# Altium PCB LY-3axis-4.0-v2.0-.PcbDoc (part 2 of 2)
Units mil, origin at the board's own origin, x right, y up, seen from the top; angles counter-clockwise.
Board outline 3940.6 x 3390.19 mil, 2 copper layers (TopLayer, BottomLayer); 147 components, 116 nets, 484 pads, 347 vias.
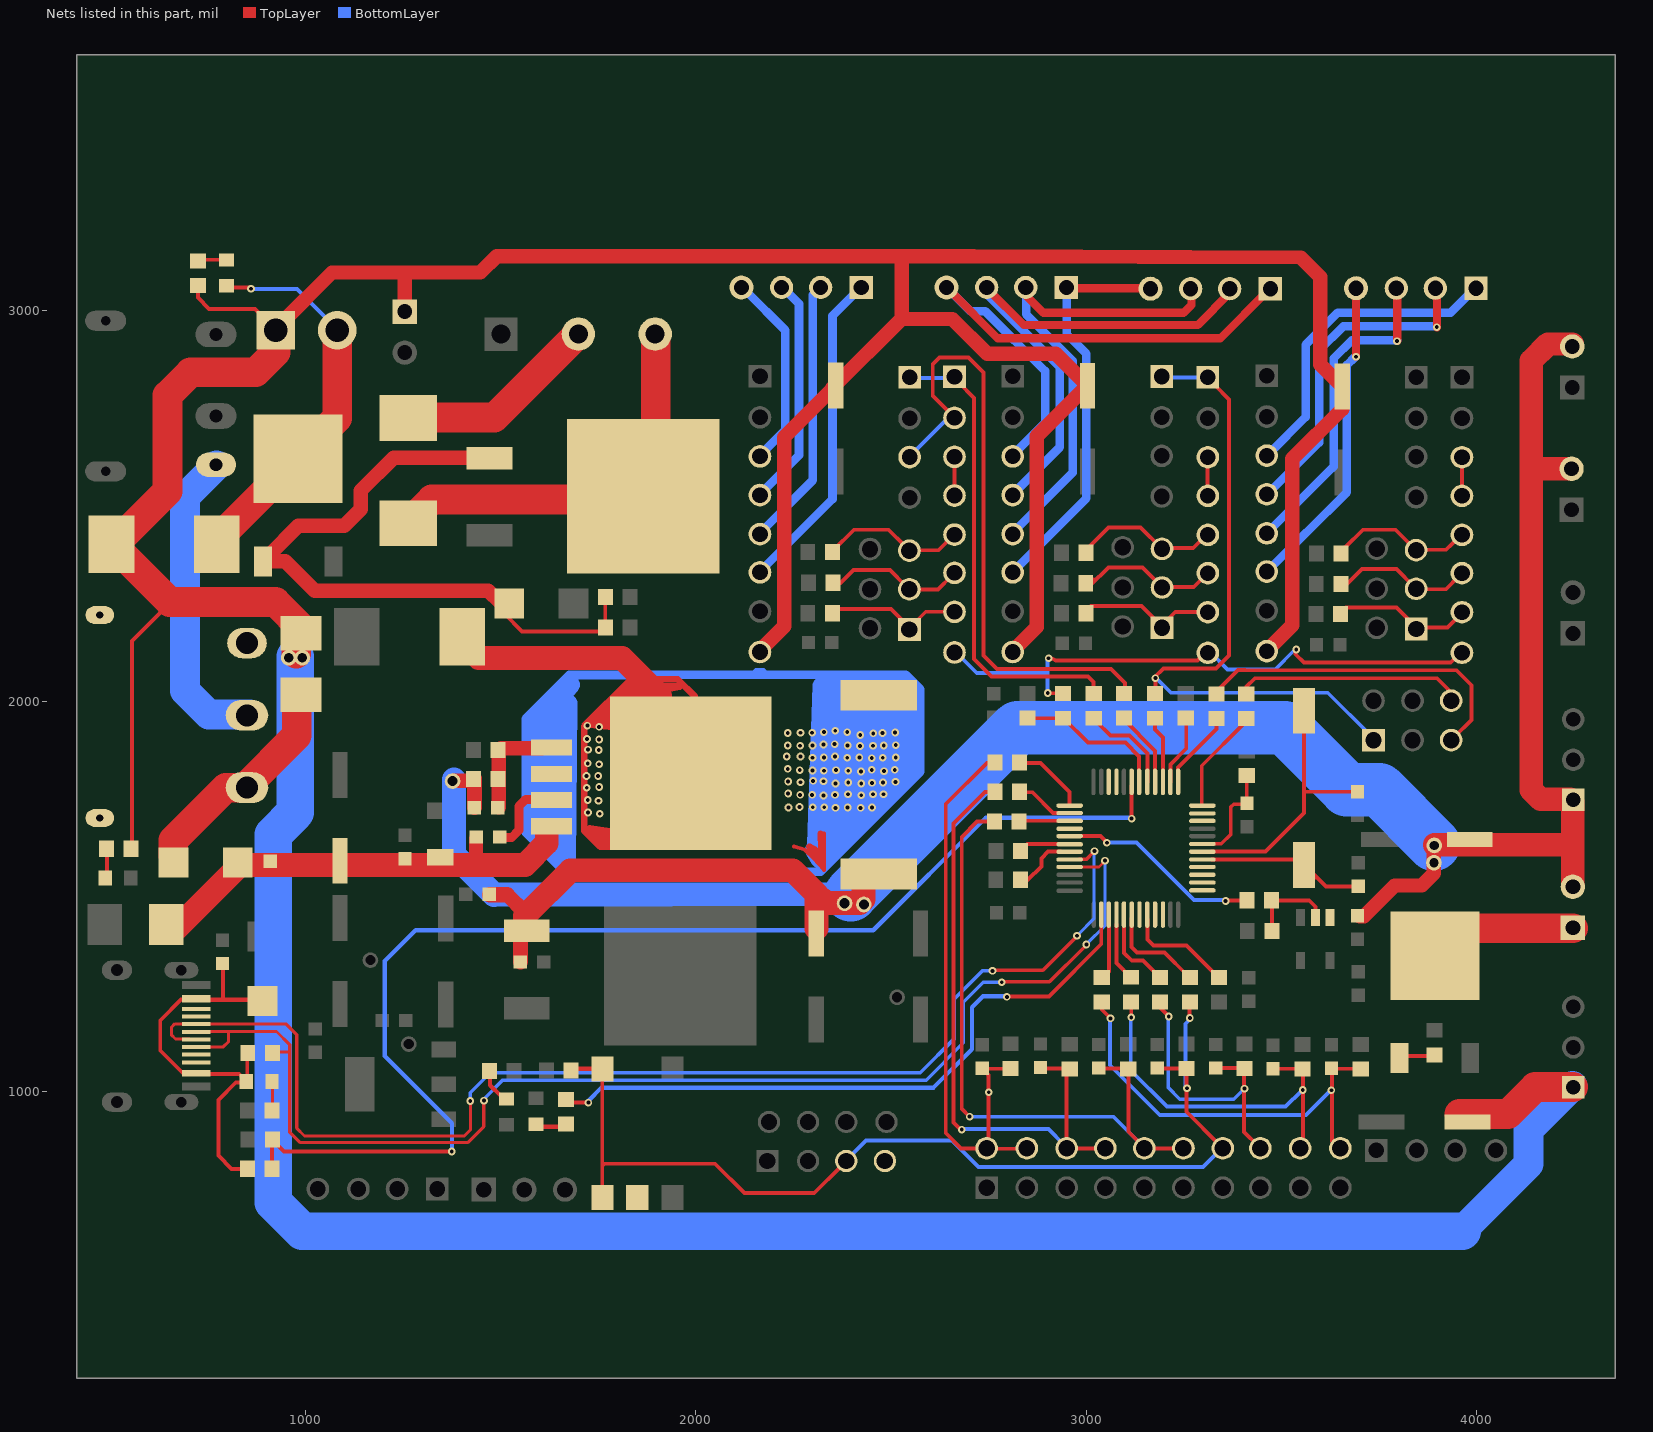
[diagram p2: the nets of this part, all layers, seen from the top]

## Via types
v1: diameter 19.68, hole 9.84, TopLayer to BottomLayer, tented both sides, 347 vias

## Nets (pads, with @x,y where several pads share a name; then routed paths per layer and width w, separated by ;. In a path a pad name is that pad's centre, name@x,y a point inside that pad or via, vN(x,y) a via of type N, cw(c..) or ccw(c..) an arc to the next point about the centre after c; other vN are vias at no path point) (continued)
UnNamedNet12: ?.1@3193.75,2831.82 ?.1@3312.08,2830 ?.1@3736.34,1900.42 ?.2@3176.25,2019.25 | length 1659.9
  TopLayer w9.94: v1@3175.83,2062.08 3197.92,2084.17 3332.92,2084.17 3366.25,2117.5 3366.25,2772.92 3329.58,2809.58 ?.1@3327.08,2809.58 ; ?.2@3178.33,2022.92 v1@3178.33,2057.5
  BottomLayer w9.94: v1@3177.08,2062.08 3217.5,2021.67 3619.17,2021.67 3727.92,1912.92 ?.1@3727.92,1911.25 ; ?.1@3209.58,2829.58 ?.1@3297.5,2829.58
  other v1: 3177.5,2059.17
UnNamedNet13: ?.2@2662.92,2725.83 ?.2@3097.08,2020.08 ?.3@2547.91,2625.5 | length 1567.6
  TopLayer w9.94: ?.2@2651.25,2742.08 2647.92,2742.08 2607.08,2782.92 2607.08,2862.92 2624.58,2880.42 2698.75,2880.42 2737.5,2841.67 2737.5,2116.67 2772.08,2082.08 3064.17,2082.08 3099.58,2046.67 ?.2@3099.58,2027.5
  BottomLayer w9.94: ?.3@2557.5,2631.67 2557.5,2636.67 ?.2@2651.25,2730.42
UnNamedNet14: ?.1@2547.92,2829.74 ?.1@2662.92,2830.83 ?.2@3019.58,2019.25 | length 1166.2
  TopLayer w9.94: ?.1@2674.58,2815.83 2713.33,2777.08 2713.33,2107.92 2757.92,2063.33 3005,2063.33 3019.17,2049.17 ?.2@3019.17,2030
  BottomLayer w9.94: ?.1@2552.92,2827.5 ?.1@2645.83,2827.5
UnNamedNet15: ?.1@553.75,1622.08 ?.1@923.75,2950.42 ?.1@2358.75,2808.75 ?.1@3003.75,2808.33 ?.1@3656.25,2805.83 ?.1@3977.08,922.08 ?.2@503.33,2402.08 ?.2@724.58,3064.92 ?.2@988.75,2174.25 ?.2@1254.58,2997.92 ?.3@4247.93,1011.08 ?.8@2164.58,2126.08 ?.8@2812.08,2126.08 ?.8@3462.92,2128.17 pad.57 pad.58 | length 13929.1
  TopLayer w9.94: ?.1@555.42,1626.25 555.42,2154.17 637.5,2236.25 ; ?.2@724.58,3060 724.58,3033.75 753.33,3005 870.83,3005 890,2985.83 ?.1@890,2980.42
  TopLayer w36.94: ?.1@930.83,2960.83 1068.33,3098.33 1448.33,3098.33 1490,3140 2712.5,3140 3550,3136.67 3600,3086.67 3600,2862.5 3655.83,2806.67 3655.83,2748.33 3528.33,2620.83 3528.33,2195 ?.8@3464.17,2130.83 ; ?.2@1255,3020 1255,3092.5 ; ?.8@2169.17,2134.17 2226.67,2191.67 2226.67,2676.67 2349.17,2799.17 2349.17,2801.67 2527.5,2980 2527.5,3130 ; 2536.67,2980 2537.5,2979.17 2657.5,2979.17 2746.67,2890 2922.5,2890 2995,2817.5 2995,2800 2873.33,2678.33 2873.33,2190 ?.8@2819.17,2135.83
  TopLayer w75.94: ?.1@923.75,2947.92 923.75,2893.75 872.5,2842.5 705.83,2842.5 646.67,2783.33 646.67,2537.92 514.58,2405.83 514.58,2392.5 652.92,2254.17 923.33,2254.17 992.08,2185.42 ?.2@992.08,2180.42 ; pad.58@976.25,2121.25 ?.2@976.25,2173.33
  TopLayer w76.94: 3957.08,942.5 4081.25,942.5 4150.42,1011.67 ?.3@4247.5,1011.67
  BottomLayer w76.94: 3961.67,642.5 4133.33,814.17 4133.33,901.67 ?.3@4245.83,1014.17
  BottomLayer w95.94: pad.57@974.17,2114.17 974.17,1715 917.5,1658.33 917.5,716.67 991.67,642.5 3963.33,642.5
UnNamedNet16: ?.1@2117.08,3060 ?.3@2164.58,2627.08 | length 487.4
  BottomLayer w21.94: ?.1@2125.83,3050.83 2128.75,3050.83 2229.17,2950.42 2229.17,2694.58 ?.3@2167.92,2633.33
UnNamedNet17: ?.2@2220.08,3060 ?.4@2164.58,2528.08 | length 578.9
  BottomLayer w21.94: ?.4@2171.25,2532.5 2171.25,2536.67 2264.58,2630 2264.58,3017.92 ?.2@2225.83,3056.67
UnNamedNet18: ?.3@2320.08,3060 ?.5@2164.58,2428.08 | length 674
  BottomLayer w21.94: ?.5@2173.75,2440 2300,2566.25 2300,3040.83 2312.08,3052.92 ?.3@2315.83,3052.92
UnNamedNet19: ?.4@2424.08,3060 ?.6@2164.58,2330.08 | length 820.5
  BottomLayer w21.94: ?.6@2173.75,2339.17 2173.75,2341.25 2350.42,2517.92 2350.42,2987.5 ?.4@2420.42,3057.5
UnNamedNet20: ?.2@2941.25,2019.25 ?.8@2662.92,2124.83 ?.8@3312.08,2124 ?.8@3962.92,2124 | length 1436
  TopLayer w9.94: v1@2907.92,2112.5 2922.92,2104.17 3285.83,2104.17 ?.8@3302.08,2120.42 ; v1@2908.33,2020.42 ?.2@2921.25,2020.42 ; v1@3536.67,2128.75 3536.67,2120.42 3558.33,2098.75 3934.17,2098.75 ?.8@3954.58,2119.17
  BottomLayer w9.94: ?.8@2678.75,2115.42 2678.75,2113.75 2720,2072.5 2897.92,2072.5 ; v1@2901.67,2025.83 v1@2901.67,2107.08 ; ?.8@3318.75,2127.92 3318.75,2125.42 3362.5,2081.67 3484.58,2081.67 v1@3534.58,2131.67
  other v1: 2901.67,2020.83 2904.17,2110 3538.33,2132.5
UnNamedNet21: ?.3@2662.92,2625.83 ?.4@2662.92,2526.83 | length 83.3
  TopLayer w9.94: ?.4@2662.92,2525.42 ?.3@2662.92,2608.75
UnNamedNet22: ?.2@2350.08,2382.08 ?.5@2547.5,2385.75 ?.5@2662.92,2426.83 | length 337.8
  TopLayer w9.94: ?.2@2351.67,2385.83 2405,2439.17 2494.17,2439.17 2534.58,2398.75 ?.5@2534.58,2389.58 ; ?.5@2570,2386.67 2622.08,2386.67 ?.5@2660.83,2425.42
UnNamedNet23: ?.2@2351.75,2303.33 ?.3@2547.5,2286.75 ?.6@2662.92,2328.83 | length 307
  TopLayer w9.94: ?.2@2359.58,2302.5 2370.83,2302.5 2404.17,2335.83 2497.5,2335.83 ?.3@2537.5,2295.83 ; ?.3@2571.67,2286.25 2620.83,2286.25 ?.6@2655.83,2321.25
UnNamedNet24: ?.1@2547.5,2183.75 ?.2@2350.08,2225.42 ?.7@2662.92,2228.83 | length 316
  TopLayer w9.94: ?.2@2363.75,2236.25 2500.42,2236.25 2545.42,2191.25 2551.25,2191.25 2589.17,2229.17 ?.7@2645.42,2229.17
UnNamedNet25: ?.1@2642.5,3060 ?.3@2812.08,2627.08 ?.4@3472,3056.67 | length 1493.7
  TopLayer w20.94: ?.1@2656.67,3046.67 2773.75,2929.58 3343.75,2929.58 3465,3050.83 ?.4@3466.67,3050.83
  BottomLayer w21.94: ?.1@2651.67,3058.33 2651.67,3051.67 2704.17,2999.17 2741.67,2999.17 2895,2845.83 2895,2713.33 ?.3@2812.08,2630.42
UnNamedNet26: ?.2@2745.5,3060 ?.3@3368,3056.67 ?.4@2812.08,2528.08 | length 1346
  TopLayer w20.94: ?.2@2750.42,3055.83 2750.42,3053.75 2840.42,2963.75 3286.25,2963.75 ?.3@3369.17,3046.67
  BottomLayer w21.94: ?.2@2733.33,3055 2932.5,2855.83 2932.5,2650.42 2816.25,2534.17 ?.4@2814.17,2534.17
UnNamedNet27: ?.2@3268,3056.67 ?.3@2845.5,3060 ?.5@2812.08,2428.08 | length 1219
  TopLayer w20.94: ?.3@2839.58,3046.25 2890.83,2995 3250,2995 3270,3015 ?.2@3270,3046.25
  BottomLayer w21.94: ?.5@2811.25,2430.83 2965.42,2585 2965.42,2872.08 2846.25,2991.25 ?.3@2846.25,3045.42
UnNamedNet28: ?.1@3165,3056.67 ?.4@2949.5,3060 ?.6@2812.08,2330.08 | length 984.6
  TopLayer w20.94: ?.4@2963.33,3057.92 ?.1@3153.33,3057.92
  BottomLayer w21.94: ?.6@2823.75,2343.33 2824.17,2343.33 3000.83,2520 3000.83,2890 2950,2940.83 ?.4@2950,3043.33
UnNamedNet29: ?.3@3312.08,2625 ?.4@3312.08,2526 | length 66.2
  TopLayer w9.94: ?.4@3311.25,2542.5 ?.3@3311.25,2608.75
UnNamedNet30: ?.2@3000.08,2380.42 ?.5@3194.58,2390.33 ?.5@3312.08,2426 | length 351.3
  TopLayer w9.94: ?.2@3008.75,2393.33 3008.75,2396.25 3057.92,2445.42 3139.17,2445.42 3192.5,2392.08 3274.58,2392.08 ?.5@3302.92,2420.42
UnNamedNet31: ?.2@2999.25,2302.08 ?.3@3194.58,2291.33 ?.6@3312.08,2328 | length 346
  TopLayer w9.94: ?.2@3011.67,2297.5 3057.08,2342.92 3144.17,2342.92 3194.17,2292.92 3275.83,2292.92 3297.5,2314.58 ?.6@3302.08,2314.58 ; ?.2@3012.5,2312.5 3019.58,2312.5
UnNamedNet32: ?.1@3194.58,2188.33 ?.2@3000.08,2225.42 ?.7@3312.08,2228 | length 310.4
  TopLayer w9.94: ?.2@3012.08,2243.75 3142.5,2243.75 3184.17,2202.08 3201.67,2202.08 3228.33,2228.75 ?.7@3294.17,2228.75
UnNamedNet33: ?.3@3462.92,2629.17 ?.4@3998.67,3057.92 | length 791.5
  BottomLayer w21.94: ?.3@3468.75,2636.25 3470.83,2636.25 3562.5,2727.92 3562.5,2912.92 3645,2995.42 3934.17,2995.42 ?.4@3982.92,3044.17
UnNamedNet34: ?.3@3894.67,3057.92 ?.4@3462.92,2530.17 | length 845.3
  TopLayer w20.94: v1@3899.17,2957.5 ?.3@3899.17,3055.42
  BottomLayer w21.94: ?.4@3465,2530.42 3597.08,2662.5 3597.08,2898.33 3658.75,2960 v1@3896.25,2960
  other v1: 3898.33,2958.33
UnNamedNet35: ?.2@3794.67,3057.92 ?.5@3462.92,2430.17 | length 820.5
  TopLayer w20.94: v1@3797.08,2923.33 ?.2@3797.08,3047.5
  BottomLayer w21.94: ?.5@3472.5,2431.25 3472.5,2440 3630.42,2597.08 3634.17,2600.83 3634.17,2877.92 3680.42,2924.17 v1@3797.5,2924.17
  other v1: 3796.67,2922.5
UnNamedNet36: ?.1@3691.67,3057.92 ?.6@3462.92,2332.17 | length 807.5
  TopLayer w20.94: v1@3691.25,2883.33 ?.1@3691.25,3051.25
  BottomLayer w21.94: ?.6@3468.33,2337.08 3468.75,2337.08 3665.42,2532.08 3668.33,2535 3668.33,2861.25 3688.33,2881.25 v1@3690.83,2883.75
  other v1: 3691.67,2882.5
UnNamedNet37: ?.3@3962.92,2625 ?.4@3962.92,2526 | length 77.1
  TopLayer w9.94: ?.4@3962.92,2536.25 ?.3@3962.92,2613.33
UnNamedNet38: ?.2@3653.42,2377.91 ?.5@3845.42,2387 ?.5@3962.92,2426 | length 335
  TopLayer w9.94: ?.2@3662.5,2393.33 3663.75,2393.33 3709.58,2439.17 3792.92,2439.17 3844.17,2387.92 3922.5,2387.92 3937.08,2402.5 ?.5@3947.08,2412.5
UnNamedNet39: ?.2@3652.58,2300.41 ?.3@3845.42,2288 ?.6@3962.92,2328 | length 334.1
  TopLayer w9.94: ?.2@3660.83,2292.92 3706.67,2338.75 3795,2338.75 3839.58,2294.17 ?.3@3842.08,2294.17 ; ?.3@3861.67,2286.67 3921.67,2286.67 3955.83,2320.83 ?.6@3962.92,2320.83
UnNamedNet40: ?.1@3845.42,2185 ?.2@3651.75,2223.75 ?.7@3962.92,2228 | length 301.7
  TopLayer w9.94: ?.2@3654.58,2228.33 3665.83,2239.58 3795,2239.58 3837.08,2197.5 ?.1@3837.08,2197.08 ; ?.1@3872.92,2188.75 3925.42,2188.75 ?.7@3956.67,2220
UnNamedNet41: ?.2@3333.75,2018.42 ?.5@3935.33,1900.41 | length 839.4
  TopLayer w9.94: ?.2@3338.33,2029.17 3388.75,2079.58 3407.08,2079.58 3948.75,2079.17 3987.08,2040.83 3987.08,1951.67 3944.58,1909.17 ?.5@3940,1909.17
UnNamedNet42: ?.2@3410.42,2018.42 ?.6@3935.34,2001.41 | length 572.8
  TopLayer w9.94: ?.2@3411.25,2029.17 3411.25,2037.5 3432.5,2058.75 3899.17,2058.75 ?.6@3947.08,2010.83
UnNamedNet43: ?.1@2766.67,1842.92 ?.2@2733.75,1060 ?.2@2745.42,854.75 ?.2@2806.66,1059.5 ?.4@2848.42,854.75 | length 1476.7
  TopLayer w9.94: ?.2@2735.83,1056.67 2750,1042.5 2750,856.25 2751.25,855 2749.58,853.33 ?.4@2842.5,853.33 ; ?.2@2738.33,854.17 2680,854.17 2640.42,893.75 2640.42,1736.25 2745.83,1841.67 ?.1@2754.58,1841.67 ; ?.2@2742.08,1058.33 ?.2@2800.83,1058.33
  other v1: 2750.83,998.33
UnNamedNet44: ?.1@2766.67,1767.92 ?.2@2883.33,1061.67 ?.2@2958.33,1058.25 ?.6@2950.42,854.75 ?.8@3049.42,854.75 | length 1542.7
  TopLayer w9.94: v1@2680.42,902.92 2678.33,902.92 2660.42,920.83 2660,921.25 2660,1686.25 2740.83,1767.08 ?.1@2767.5,1767.08 ; ?.2@2887.08,1057.5 2888.75,1059.17 ?.2@2944.17,1059.17 ; ?.2@2950,1043.75 2950,864.58 2960.42,854.17 3040.83,854.17 ?.8@3041.67,855
  BottomLayer w9.94: v1@2683.33,904.17 2903.33,904.17 ?.6@2942.5,865
  other v1: 2681.67,902.5
UnNamedNet45: ?.1@2765.42,1692.08 ?.2@3032.08,1060.42 ?.2@3107.91,1058.25 ?.10@3149.42,854.75 ?.12@3249.42,854.75 | length 1643.8
  TopLayer w9.94: v1@2700,936.67 2681.67,955 2681.67,1652.5 2720.83,1691.67 ?.1@2755.83,1691.67 ; ?.2@3047.08,1059.17 ?.2@3102.5,1059.17 ; ?.2@3108.33,1047.92 3108.33,897.08 3151.25,854.17 ?.12@3239.17,854.17
  BottomLayer w9.94: v1@2705.42,935.42 3070.42,935.42 3142.08,863.75 ?.10@3150.83,863.75
  other v1: 2701.67,935.83
UnNamedNet46: ?.1@1680.42,1053.75 ?.1@1761.25,728.75 ?.2@3182.08,1060.42 ?.2@3257.08,1059.08 ?.2@3265.83,1229.5 ?.5@1761.25,1057.75 ?.5@2385.75,822.08 ?.14@3350.42,854.75 | length 2543.2
  TopLayer w9.94: ?.1@1760.42,745.42 ?.5@1760.42,1038.75 ; 1764.17,813.33 1765.83,815 2049.58,815 2124.58,740 2303.75,740 ?.5@2370.42,806.67 ; ?.2@3195,1058.75 ?.2@3249.58,1058.75 ; ?.2@3257.08,1051.25 3257.08,948.33 3340.83,864.58 ?.14@3343.75,864.58 ; v1@3264.58,1194.17 ?.2@3264.58,1222.08
  TopLayer w10.94: ?.1@1695.42,1058.33 1740.83,1058.33 ?.5@1760.42,1038.75
  BottomLayer w9.94: ?.5@2392.5,827.08 2392.5,830.83 2435.83,874.17 2656.67,874.17 2724.58,806.25 3299.17,806.25 ?.14@3347.92,855 ; v1@3255,1009.58 3255,1173.75 3262.5,1181.25 v1@3262.5,1185.42
  other v1: 3258.33,1008.33 3265.83,1188.33
UnNamedNet47: ?.2@3189.58,1229.08 ?.2@3332.08,1060.42 ?.2@3405.41,1059.08 ?.16@3446.42,854.75 | length 705.7
  TopLayer w9.94: ?.2@3185.83,1218.75 v1@3208.33,1196.25 ; ?.2@3333.33,1060 ?.2@3397.08,1060 ; ?.2@3405,1058.75 3405,896.25 3441.25,860 ?.16@3443.75,860
  BottomLayer w9.94: v1@3210.42,1191.25 3210.42,1010 3240,980.42 3378.33,980.42 v1@3401.25,1003.33
  other v1: 3405.83,1007.5 3211.67,1192.5
UnNamedNet48: ?.2@3115.41,1229.92 ?.2@3478.75,1058.75 ?.2@3554.58,1057.42 ?.18@3548.42,854.75 | length 914
  TopLayer w9.94: v1@3115.83,1193.75 ?.2@3115.83,1226.67 ; ?.2@3489.17,1058.33 ?.2@3551.25,1058.33 ; ?.18@3555.42,862.92 ?.2@3555.42,1052.5
  BottomLayer w9.94: v1@3114.58,1188.33 3114.58,1054.17 3207.5,961.25 3511.25,961.25 3551.67,1001.67 v1@3554.58,1001.67
  other v1: 3555,1004.17 3115.83,1190
UnNamedNet49: ?.2@3040,1229.5 ?.2@3628.75,1059.58 ?.2@3703.75,1057.42 ?.20@3651.42,854.75 | length 1062.1
  TopLayer w9.94: ?.2@3041.25,1227.08 3041.25,1209.58 3060.42,1190.42 v1@3061.67,1190.42 ; ?.2@3629.58,1052.5 3629.58,873.75 3639.58,863.75 ?.20@3639.58,863.33 ; ?.2@3632.5,1058.33 ?.2@3687.5,1058.33
  BottomLayer w9.94: v1@3060.83,1189.17 3060.83,1067.5 3188.75,939.58 3563.33,939.58 3626.67,1002.92 v1@3627.92,1002.92
  other v1: 3628.33,1003.33 3062.5,1187.5
UnNamedNet50: ?.7@2484.75,822.08
UnNamedNet51: ?.2@3893.72,1348.42 ?.2@4247.08,1419.58 | length 320.4
  TopLayer w74.94: ?.2@3937.5,1393.33 ?.2@3962.5,1418.33
  TopLayer w75.94: ?.2@3962.5,1418.33 ?.2@4247.5,1418.33
UnNamedNet52: ?.1@1471.25,1505.42 ?.1@1550.42,1332.08 ?.1@1567.08,1412.08 ?.1@2308.75,1404.58 ?.1@2468.75,1557.08 ?.1@3982.92,1645.42 ?.1@4243.75,2595.42 ?.1@4245.42,2908.75 ?.1@4247.08,1524.58 ?.2@1430.75,1800.42 ?.2@1432.92,1727.08 ?.2@3695.42,1450.42 ?.3@4247.92,1747.75 pad.49 pad.52 pad.53 pad.55 pad.56 | length 6686.3
  TopLayer w36.94: pad.49@1381.67,1796.25 1427.08,1796.25 ?.2@1432.92,1802.08 ; ?.2@3701.25,1449.17 3712.08,1449.17 3790.83,1527.92 3859.58,1527.92 3890.42,1558.75 pad.52@3890.42,1617.5
  TopLayer w37.94: ?.2@1432.92,1727.5 ?.2@1432.92,1802.08
  TopLayer w38.94: ?.1@1472.5,1504.17 1517.08,1504.17 1561.25,1460 1561.25,1457.08 ; ?.1@1549.58,1397.08 1551.25,1395.42 ?.1@1551.25,1332.5
  TopLayer w59.94: pad.52@3892.5,1632.5 4226.67,1632.5 ; 4160.83,2595 ?.1@4235,2595 ; ?.1@4245,2915 4183.33,2915 4140.83,2872.5 4140.83,1772.5 4165,1748.33 4240,1748.33 4246.67,1741.67 ?.1@4246.67,1529.17
  TopLayer w60.94: ?.1@1562.5,1425.83 1562.5,1450.42 1678.75,1566.67 2248.75,1566.67 2309.17,1506.25 ?.1@2309.17,1417.5 ; 2323.33,1482.92 2420,1482.92 2429.58,1492.5 ?.1@2429.58,1528.33 ; 2323.75,1491.25 2326.25,1491.25
  BottomLayer w61.94: pad.49@1380.83,1799.17 1380.83,1606.67 1483.33,1504.17 2397.5,1505.83
  BottomLayer w136.94: 2397.08,1504.58 2824.58,1932.08 3509.17,1932.08 3667.92,1773.33 3751.25,1773.33 pad.52@3891.25,1633.33
UnNamedNet53: ?.1@773.33,2402.08 ?.2@798.33,3064.42 ?.2@981.25,2621.33 ?.2@1081.75,2950.42 | length 782.9
  TopLayer w9.94: 818.33,3060 v1@860.42,3060
  TopLayer w75.94: ?.1@786.67,2416.67 786.67,2427.5 ?.2@925.83,2566.67 ; ?.2@1028.33,2668.33 1028.33,2671.67 1081.67,2725 ?.2@1081.67,2937.5
  BottomLayer w9.94: v1@866.67,3056.25 978.33,3056.25 ?.2@1070.42,2964.17
  other v1: 860.83,3056.67
UnNamedNet54: ?.1@1263.75,2455.42 ?.2@1865.08,2525.08 ?.3@1896.25,2940.42 | length 770.6
  TopLayer w75.94: ?.1@1276.67,2469.17 1324.17,2516.67 1740.83,2516.67 ?.2@1747.5,2510 ; ?.3@1897.5,2935.83 1897.5,2660.83 ?.2@1899.17,2659.17
UnNamedNet55: ?.2@1263.75,2725.42 ?.2@1699.25,2940.42 | length 475.3
  TopLayer w75.94: ?.2@1300.83,2731.67 1305.83,2726.67 1484.17,2726.67 ?.2@1689.17,2931.67
UnNamedNet56: ?.1@850.42,2148.75
UnNamedNet57: ?.2@850.42,1963.75 ?.3@771.25,2605.58 | length 802
  BottomLayer w75.94: ?.3@772.5,2604.17 691.67,2523.33 691.67,2026.67 752.5,1965.83 ?.2@857.5,1965.83
UnNamedNet58: ?.1@662.08,1587.08 ?.1@988.75,2016.25 ?.3@850.42,1778.75 | length 557.6
  TopLayer w75.94: ?.1@661.25,1603.75 661.25,1643.33 795.83,1777.92 843.75,1777.92 977.92,1912.08 ?.1@977.92,1999.17
  TopLayer w76.94: ?.1@977.92,1999.17 ?.1@980,2001.25
UnNamedNet59: ?.4@473.42,2220.75
UnNamedNet60: ?.5@473.42,1700.75
UnNamedNet61: ?.1@848.75,1025.42 ?.1@890.42,1232.08 ?.2@720.42,1237.92 ?.2@787.92,1327.92 ?.2@851.58,802.08 ?.2@852.42,1098.75 ?.11@720.42,1046.92 | length 977.4
  TopLayer w9.94: ?.11@688.75,1049.17 684.58,1049.17 628.33,1105.42 628.33,1182.5 681.25,1235.42 ?.2@749.17,1235.42 ; ?.11@739.17,1044.58 830.42,1044.58 832.08,1042.92 ?.1@837.5,1037.5 ; 789.17,1238.33 ?.2@789.17,1327.5 ; ?.2@839.58,801.67 811.25,801.67 777.08,835.83 777.08,978.75 821.67,1023.33 845.42,1023.33 851.25,1029.17 ?.2@851.25,1082.92
  TopLayer w10.94: ?.2@749.17,1235.42 ?.1@864.17,1235.42
UnNamedNet62: ?.3@720.42,1211.92
UnNamedNet63: ?.4@720.42,1191.92
UnNamedNet64: ?.5@720.42,1172.92 ?.7@720.42,1133.92 ?.32 | length 3246.2
  TopLayer w7.94: ?.7@702.92,1134.58 667.5,1134.58 656.67,1145.42 656.67,1164.17 665.83,1173.33 950,1173.33 977.92,1145.42 977.92,906.25 997.92,886.25 1407.08,886.25 1422.92,902.08 v1@1422.92,972.92
  TopLayer w8.94: v1@2766.67,1310 2767.5,1310.83 2889.58,1310.83 v1@2975.42,1396.67 ; ?.32@2982.08,1594.58 3000.42,1594.58 v1@3020,1614.17
  BottomLayer w7.94: v1@2979.17,1401.25 2979.17,1401.67 3020,1442.5 v1@3020,1618.75
  BottomLayer w8.94: v1(1422.5,975.83) 1422.5,996.67 1473.75,1047.92 2575,1047.92 2662.92,1135.83 2662.92,1237.5 2735.42,1310 v1@2757.5,1310
  other v1: 2760.42,1309.17 2976.67,1399.17 3021.67,1615.83
UnNamedNet65: ?.1@915.42,1098.75 ?.6@720.42,1152.92 ?.8@720.42,1113.92 ?.33 | length 3214
  TopLayer w7.94: ?.8@748.33,1113.75 788.75,1113.75 803.33,1128.33 803.33,1150 ; ?.6@748.33,1153.75 926.25,1153.75 960,1120 960,895.83 985.83,870 1417.08,870 1457.08,910 v1@1457.08,971.67 ; ?.1@922.92,1100.83 957.08,1100.83 ; ?.33@2977.92,1575.42 3033.33,1575.42 v1@3047.5,1589.58
  TopLayer w8.94: v1@2788.75,1280.83 2906.25,1280.83 v1@2996.67,1371.25
  BottomLayer w7.94: v1@3000.83,1376.25 3000.83,1377.08 3048.33,1424.58 v1@3048.33,1592.92
  BottomLayer w8.94: v1@1459.17,981.25 1459.17,983.33 1505,1029.17 2590.42,1029.17 2685.83,1124.58 2685.83,1229.17 2736.67,1280 v1@2777.08,1280
  other v1: 1457.5,976.67 2784.17,1280 3000.83,1376.67 3048.33,1591.67
UnNamedNet66: ?.9@720.42,1094.92
UnNamedNet67: ?.10@720.42,1074.92
UnNamedNet68: ?.2@1401.67,2164.58 ?.2@2468.75,2015.08 ?.3@1630.42,1813.75 ?.6@1987.42,1815.75 | length 10251.5
  TopLayer w9.94: 2252.08,1627.92 2280.42,1619.17 2302.5,1597.08 2328.33,1567.92 2328.33,1660.83 ; 2319.58,1660.83 2326.67,1660.83
  TopLayer w14.94: 2319.58,1660.83 2322.08,1585.42
  TopLayer w16.94: v1@1726.67,1939.58 1790,1932.92 1782.5,1950 1738.33,1945.83 1782.08,1986.25 1779.17,1960.42 1762.5,1952.92 1808.33,2014.17 1840.83,2037.5 1832.92,2038.75 1951.25,2038.75 1958.75,2037.08 1860,2018.33 1822.08,2010 1847.08,2029.58 1852.5,2022.5 ; 1728.33,1674.58 1781.25,1666.25 1770,1655.42 1779.58,1653.33 1730.42,1671.67 1762.08,1640 ?.6@1792.08,1640 ; ?.6@1787.92,1627.92 1755,1627.92 1714.17,1668.75 1714.17,1936.25 1833.75,2055.83 1954.17,2055.83 1997.92,2012.08 ?.6@1997.92,2002.08 ; 2310,1611.67 2306.25,1618.75 2290.83,1627.5 2322.08,1585.42
  TopLayer w60.94: ?.2@1427.5,2127.5 1444.17,2110.83 1810.83,2110.83 1908.33,2013.33
  BottomLayer w9.94: 2145.83,2070.83 2154.58,2079.58 2173.33,2079.58 2181.67,2071.25
  BottomLayer w21.94: 1657.92,1569.58 1564.17,1663.33 1564.17,1955 1676.25,2067.08 1835.83,2067.08 2537.92,2067.92 2575.42,2030.42 2575.42,1819.17 2320.83,1563.33 1665.83,1563.33 1660.42,1568.75 ; 1659.58,1563.75 1661.25,1569.58
  BottomLayer w44.94: 1632.5,1936.67 1611.67,1690 1639.17,1659.17 1640,1970 1675,1994.17 1670.83,1588.33 1589.17,1677.5 1592.5,1943.33 1681.67,2041.67 ; 2302.5,1619.17 2317.5,1594.17 2555.83,1837.5 2548.33,2017.5 2534.17,2035 2321.67,2040 2307.5,1632.5 v1@2519.17,1858.33
  BottomLayer w51.94: 2504.17,2004.17 v1@2506.67,1860
  BottomLayer w53.94: 2355.83,2016.67 2396.67,1962.5 2342.5,1890.83 2363.33,1998.33 2434.17,1997.5 2419.17,1886.67 2320.83,1811.67 2458.33,1995 2473.33,1995 2332.5,1772.5 2470.83,1851.67 2332.5,1707.5 2452.5,1858.33 2504.17,2004.17
  other v1: 1754.17,1711.67 1724.17,1715 2358.33,1726.67 2422.5,1726.67 2237.5,1727.5 2300,1728.33 2329.17,1728.33 2389.17,1727.5 2451.67,1727.5 2265.83,1729.17 1750.83,1745 1723.33,1746.67 2327.5,1758.33 2424.17,1759.17 2267.5,1760 2298.33,1760 2356.67,1760 2390,1761.67 2454.17,1761.67 2480.83,1761.67 2236.67,1763.33 1720.83,1778.33 1752.5,1780 2358.33,1789.17 2424.17,1789.17 2451.67,1790.83 2268.33,1792.5 2390.83,1791.67 2480,1791.67 2511.67,1793.33 2236.67,1794.17 2327.5,1795 2300.83,1795.83 1720,1808.33 1750,1808.33 2423.33,1820 2482.5,1820.83 2299.17,1822.5 2328.33,1821.67 2390.83,1821.67 2266.67,1823.33 2359.17,1823.33 2450.83,1824.17 2510,1824.17 2235.83,1826.67 1752.5,1838.33 1723.33,1840.83 2450.83,1854.17 2299.17,1855 2388.33,1855 2479.17,1855 2328.33,1855.83 2419.17,1855.83 2512.5,1855.83 2233.33,1858.33 2268.33,1858.33 2356.67,1858.33 1751.67,1875 1724.17,1875.83 2420.83,1885 2267.5,1885.83 2454.17,1885.83 2235.83,1886.67 2299.17,1886.67 2389.17,1886.67 2481.67,1886.67 2512.5,1887.5 2327.5,1889.17 2355.83,1890 1752.5,1901.67 1721.67,1903.33 2421.67,1913.33 2235.83,1918.33 2455,1917.5 2478.33,1918.33 2268.33,1919.17 2298.33,1919.17 2510.83,1920 2328.33,1920.83 2388.33,1920.83 2357.5,1924.17 1752.5,1934.17 1722.5,1937.5
UnNamedNet69: ?.1@1088.33,1591.25 ?.1@1345.42,1600.42 ?.2@643.83,1428.33 ?.2@827.08,1587.08 ?.2@910.42,1590.42 ?.2@1255.42,1596.25 ?.2@1437.92,1652.08 ?.5@1630.42,1679.75 | length 1134.9
  TopLayer w36.94: ?.2@1437.08,1647.5 1437.08,1590.83 1440.42,1587.5
  TopLayer w60.94: ?.2@661.67,1420.42 672.5,1420.42 832.5,1580.42 1562.5,1580.42 1618.33,1636.25 ?.5@1618.33,1663.75
UnNamedNet70: ?.1@1497.92,1652.08 ?.4@1630.42,1746.75 | length 164.4
  TopLayer w22.94: ?.1@1511.25,1650.83 1528.33,1650.83 1547.08,1669.58 1547.08,1730.42 1565,1748.33 ?.4@1599.58,1748.33
UnNamedNet71: ?.1@1492.92,1727.08 ?.1@1493.75,1800.42 ?.1@1493.75,1875.42 ?.2@1630.42,1881.75 | length 258.2
  TopLayer w36.94: ?.1@1495,1727.92 1495,1873.33 1501.67,1880 ?.2@1605,1880
UnNamedNet72: ?.1@891.25,2358.33 ?.1@1472.08,2622.08 ?.2@1522.08,2250.42 ?.2@1769.08,2188.75 ?.2@1769.08,2267.08 | length 1660.9
  TopLayer w9.94: ?.2@1510.83,2223.33 1555.42,2178.75 1761.25,2178.75 1768.33,2185.83 ?.2@1768.33,2252.08
  TopLayer w36.94: ?.1@1430.83,2623.75 1226.25,2623.75 1142.08,2539.58 1142.08,2491.67 1099.58,2449.17 981.67,2449.17 905.42,2372.92 905.42,2358.75 948.75,2358.75 1024.17,2283.33 1468.75,2283.33 1500,2252.08 ?.2@1505.42,2252.08
UnNamedNet73: ?.1@3802.92,1085.42 ?.2@3892.91,1094.08 | length 62.1
  TopLayer w9.94: ?.1@3819.58,1091.25 ?.2@3881.67,1091.25
UnNamedNet74: ?.2@1850.25,728.75
UnNamedNet75: ?.1@3558.75,1580.42 ?.1@3697.08,1526.25 ?.5@3297.92,1594.42 | length 381.4
  TopLayer w9.94: ?.5@3322.92,1594.17 ?.1@3554.58,1594.17 ; ?.1@3567.5,1567.92 3572.5,1567.92 3615,1525.42 ?.1@3688.75,1525.42 ; ?.1@3578.75,1547.92 3589.58,1547.92
UnNamedNet76: ?.2@3557.75,1975.42 ?.2@3695.42,1767.92 ?.6@3297.92,1614.42 | length 636.6
  TopLayer w9.94: ?.6@3321.25,1615 3460,1615 3558.33,1713.33 ?.2@3558.33,1940 ; 3562.92,1767.92 ?.2@3695,1767.92
UnNamedNet77: ?.1@3624.58,1446.25
UnNamedNet78: ?.1@3475.42,1490 ?.1@3475.83,1411.25 ?.2@3587.58,1446.25 | length 203.9
  TopLayer w9.94: ?.1@3476.67,1415.83 3476.67,1478.33 3487.92,1489.58 3571.67,1489.58 3587.92,1473.33 ?.2@3587.92,1454.58
UnNamedNet79: ?.1@914.58,951.25 ?.2@914.75,1025.42 | length 53.3
  TopLayer w7.94: ?.1@915.83,958.75 ?.2@915.83,1012.08
UnNamedNet80: ?.1@914.58,802.08 ?.1@915.42,877.08 ?.19@3116.92,1793.42 | length 3235.7
  TopLayer w9.94: ?.1@914.58,807.08 ?.1@914.58,869.58 ; ?.1@915.42,875.83 945,846.25 1372.5,846.25 v1@1374.17,847.92 ; ?.19@3116.67,1782.92 3116.67,1705.83 v1@3117.92,1704.58
  BottomLayer w10.94: v1@1375.42,846.67 1375.42,918.75 1203.33,1090.83 1203.33,1334.17 1282.5,1413.33 2455,1413.33 2743.33,1701.67 v1@3115,1701.67
  other v1: 1375,846.67 3116.67,1699.17
UnNamedNet81: ?.1@1515,980.83 ?.2@1471.58,1052.92 | length 75
  TopLayer w10.94: ?.2@1472.92,1046.25 1472.92,1016.25 1502.08,987.08 ?.1@1505.83,987.08
UnNamedNet82: ?.1@1667.92,979.58 ?.38 | length 1643.3
  TopLayer w9.94: ?.1@1674.58,971.67 v1@1717.92,971.67 ; v1@2800,1243.75 2904.58,1243.75 3038.75,1377.92 ?.38@3038.75,1442.08
  BottomLayer w10.94: v1@1725.83,977.08 1758.75,1010 2609.17,1010 2707.5,1108.33 2707.5,1215.83 2735.83,1244.17 v1@2793.75,1244.17
  other v1: 1725,971.67 2797.08,1242.5
UnNamedNet83: ?.2@1590.42,916.5 ?.2@1667.92,916.58 | length 72.3
  TopLayer w10.94: ?.2@1591.67,910 1663.33,910 ?.2@1663.75,910.42
UnNamedNet84: ?.1@487.08,1547.08 ?.2@490.75,1622.08 | length 51.2
  TopLayer w9.94: ?.1@491.67,1557.5 ?.2@491.67,1608.75
UnNamedNet85: ?.1@724.58,3127.92 ?.1@798.33,3130.42 | length 63
  TopLayer w9.94: ?.1@727.92,3129.58 729.17,3130.83 ?.1@790.42,3130.83
UnNamedNet86: ?.2@2831.75,1542.5 ?.31 | length 134.2
  TopLayer w9.94: ?.2@2842.5,1541.67 2850.42,1541.67 2885.42,1576.67 2885.42,1597.08 2902.92,1614.58 ?.31@2934.58,1614.58
UnNamedNet87: ?.2@2832.17,1616.67 ?.30 | length 111.7
  TopLayer w9.94: ?.2@2833.75,1617.92 2850,1634.17 ?.30@2938.75,1634.17
UnNamedNet88: ?.2@2828.42,1692.08 ?.27 | length 101.7
  TopLayer w9.94: ?.2@2833.33,1693.75 ?.27@2935,1693.75
UnNamedNet89: ?.2@2829.67,1767.92 ?.26 | length 126.1
  TopLayer w9.94: ?.2@2844.17,1766.67 2862.5,1766.67 2915.42,1713.75 ?.26@2948.33,1713.75
UnNamedNet90: ?.2@2829.67,1842.92 ?.25 | length 185.3
  TopLayer w9.94: ?.2@2834.17,1841.25 2882.92,1841.25 2957.08,1767.08 ?.25@2957.08,1735.42
UnNamedNet91: ?.1@2850,1956.67 ?.1@2941.25,1956.25 ?.18@3135.92,1793.42 | length 388
  TopLayer w9.94: ?.1@2859.17,1957.5 2860.42,1956.25 2942.5,1956.25 3005,1893.75 3100.83,1893.75 3135.83,1858.75 ?.18@3135.83,1788.33
UnNamedNet92: ?.1@3019.58,1956.25 ?.17@3156.92,1793.42 | length 238.2
  TopLayer w9.94: ?.1@3025.83,1948.75 3062.5,1912.08 3111.25,1912.08 3156.92,1866.42 ?.17@3156.92,1793.42
UnNamedNet93: ?.1@3097.08,1957.08 ?.16@3176.92,1793.42 | length 196.3
  TopLayer w9.94: ?.1@3094.17,1955.42 3176.92,1872.67 ?.16@3176.92,1793.42
UnNamedNet94: ?.1@3176.25,1956.25 ?.15@3196.92,1793.42 | length 165
  TopLayer w9.94: ?.1@3176.67,1950 3176.67,1927.08 3196.92,1906.83 ?.15@3196.92,1793.42
UnNamedNet95: ?.1@3255.42,1957.08 ?.14@3215.92,1793.42 | length 175.1
  TopLayer w9.94: ?.14@3215.92,1793.42 3215.92,1837.58 3256.67,1878.33 ?.1@3256.67,1951.67
UnNamedNet96: ?.1@3333.75,1955.42 ?.13@3235.92,1793.42 | length 200
  TopLayer w9.94: ?.13@3235.92,1793.42 3235.92,1830.5 3333.75,1928.33 ?.1@3333.75,1952.92
UnNamedNet97: ?.1@3410.42,1955.42 ?.12@3297.92,1732.42 | length 259.7
  TopLayer w9.94: ?.12@3296.25,1733.75 3296.25,1834.58 3404.17,1942.5 ?.1@3404.17,1948.75
UnNamedNet98: ?.1@3411.67,1809.17 ?.2@3412.08,1738.75 ?.7@3297.92,1634.42 | length 231
  TopLayer w8.94: ?.7@3320.42,1634.58 3346.25,1634.58 3371.25,1659.58 3371.25,1729.58 3377.92,1736.25 ?.2@3410.42,1736.25 ; ?.2@3411.67,1743.33 ?.1@3411.67,1801.25
UnNamedNet99: ?.2@3412.42,1490 ?.29 | length 489.6
  TopLayer w9.94: ?.29@2970,1655 3036.67,1655 3051.25,1640.42 v1@3051.67,1640.42 ; v1@3362.08,1489.58 ?.2@3407.08,1489.58
  BottomLayer w9.94: v1@3056.25,1637.92 3129.17,1637.92 3276.67,1490.42 v1@3352.08,1490.42
  other v1: 3357.5,1488.33 3053.33,1637.5
UnNamedNet100: ?.1@3340.42,1292.5 ?.44 | length 262.1
  TopLayer w9.94: ?.44@3157.5,1440.42 3157.5,1389.58 3172.5,1374.58 3257.5,1374.58 3329.17,1302.92 ?.1@3332.92,1302.92
UnNamedNet101: ?.1@3265.83,1292.5 ?.42 | length 245.7
  TopLayer w9.94: ?.42@3116.67,1442.92 3116.67,1370 3130.83,1355.83 3201.25,1355.83 3259.17,1297.92 ?.1@3259.58,1297.92
UnNamedNet102: ?.1@3189.58,1292.08 ?.41 | length 185.8
  TopLayer w9.94: ?.41@3097.08,1431.67 3097.08,1355.42 3117.08,1335.42 3146.25,1335.42 3180.42,1301.25 ?.1@3180.42,1297.5
UnNamedNet103: ?.1@3115.42,1292.92 ?.40 | length 154.3
  TopLayer w9.94: ?.40@3077.5,1427.5 3077.5,1329.17 ?.1@3117.08,1289.58
UnNamedNet104: ?.1@3040,1292.5 ?.39 | length 137.6
  TopLayer w9.94: ?.1@3054.17,1302.92 3058.33,1307.08 ?.39@3058.33,1438.75
UnNamedNet105: ?.1@3297.92,1515.42
UnNamedNet106: ?.2@3297.92,1535.42
UnNamedNet107: ?.3@3297.92,1555.42
UnNamedNet108: ?.4@3297.92,1575.42
UnNamedNet109: ?.10@3297.92,1693.42
UnNamedNet110: ?.11@3297.92,1712.42
UnNamedNet111: ?.21
UnNamedNet112: ?.22
UnNamedNet113: ?.28
UnNamedNet114: ?.43
UnNamedNet115: ?.45
UnNamedNet116: ?.46
copper on no net: | length 71.7
  TopLayer w6.87: 963.33,1199.58 983.33,1180.42 983.33,1198.33 980,1196.25 979.58,1188.75 971.67,1199.58 972.92,1199.58

## Polygon pours and split planes (outlines as drawn)
UnNamedNet3 on TopLayer "TopLayer-UnNamedNet3 1" (hatched 90Degree grid 7.87 track 7.87, remove dead copper, pour order 2): 447.5,2495.83 528.33,2495.83 585,2552.5 585,2662.5 477.92,2662.5 460,2680.42 445.42,2680.42 445.42,2501.67
UnNamedNet3 on TopLayer "TopLayer-UnNamedNet3" (hatched 90Degree grid 7.87 track 7.87, remove dead copper, pour order 0): 970.83,705.83 970.83,681.67 612.5,681.67 630,699.17 647.08,725 658.75,754.17 661.67,775 662.08,801.67 656.67,831.25 644.17,860.83 621.67,890.83 597.92,911.67 571.67,924.17 545.42,932.5 511.67,935.83 479.17,930 447.08,917.92 446.67,917.92 445,917.92 445,1656.25 579.17,1655.83 579.17,2146.67 645,2212.5 645,2336.67 594.17,2387.5 594.17,2445 692.5,2543.33 692.5,2795.42 577.92,2795.42 480.42,2892.92 445,2892.92 445,2998.75 483.33,2990 542.92,2985 563.33,2989.58 587.08,3000.83 607.5,3013.33 627.08,3032.92 645.42,3058.33 656.25,3086.67 661.25,3113.75 660.42,3149.17 652.5,3179.58 640.83,3201.25 622.5,3225.42 600,3246.25 592.92,3248.75 4166.67,3247.08 4171.67,3247.92 4147.08,3228.33 4126.25,3202.08 4110,3166.67 4106.67,3148.33 4104.58,3122.5 4107.5,3098.75 4114.58,3072.92 4125.83,3050.83 4141.25,3029.58 4161.67,3011.25 4183.33,2995.42 4207.92,2985.42 4235,2980.42 4256.25,2977.5 4270.42,2980.83 4305,2990.42 4322.5,2997.08 4322.5,2273.33 4300.42,2273.33 4300.83,1798.33 4202.5,1798.33 4202.5,1260 4324.58,1260 4324.58,915 4299.17,930 4272.5,935 4238.33,934.17 4223.75,933.33 4203.75,927.5 4183.75,919.58 4160.42,902.92 4139.58,882.5 4125.42,861.25 4114.17,836.67 4106.67,804.17 4106.67,779.58 4112.08,750 4125.42,721.25 4145,692.08 4158.33,681.25 3746.25,681.25 2544.17,683.75 2501.25,683.75 1897.5,683.33 1897.5,823.33 1748.33,823.33 1748.33,749.17 1719.17,749.17 1719.17,674.17 1063.33,674.17 1033.33,715 973.33,706.67
UnNamedNet3 on BottomLayer "BottomLayer-UnNamedNet3" (hatched 90Degree grid 7.87 track 7.87, remove dead copper, pour order 4): 461.67,2195.42 445,2195.42 445,915.83 470.83,928.75 494.58,935 517.08,937.08 537.5,935.42 572.08,925.42 601.67,907.92 617.5,895.42 637.5,871.25 650,844.17 657.5,825.42 660,795 656.67,759.58 647.92,732.92 634.58,706.25 610.42,681.25 857.92,681.25 858.33,708.33 1540,708.33 1540,815 1540,835 2205,835 2258.33,781.67 2650,781.67 2650,728.33 3815,728.33 4026.67,940 4145,940 4182.5,977.5 4261.67,977.5 4261.67,935.42 4277.92,935 4305,927.08 4321.25,918.75 4321.25,3004.58 4288.75,2990.83 4260,2985 4227.08,2986.67 4194.58,2996.25 4158.33,3018.33 4128.75,3050.42 4113.75,3080 4106.67,3114.58 4106.25,3148.75 4113.75,3178.33 4133.75,3216.67 4155.83,3241.25 4171.67,3250.83 1875.83,3251.25 1267.08,3248.75 595.83,3248.75 612.92,3235.83 632.08,3216.25 645,3192.08 653.33,3174.58 659.58,3150.42 660.42,3137.08 661.25,3115.42 658.33,3095.42 645,3059.17 627.92,3032.92 605.83,3012.92 583.33,2998.33 558.75,2987.92 532.5,2983.75 461.25,2995 445.83,3000.83 444.17,2990 448.33,2945.42 492.92,2921.67 629.58,2807.5 651.25,2743.33 647.5,2633.33 677.5,2595.83 747.5,2515 747.5,2482.5 445,2482.5 445,2243.75 460.83,2243.75 460.83,2194.17

## Keep-outs
KeepOutLayer:
  circle w3.94: c663.44,1255.94 r15
  circle w3.94: c663.44,1029.9 r15
  circle w3.94: c517.5,790 r62.4
  circle w3.94: c4253.96,787.92 r62.4
  circle w3.94: c4251.04,3125.21 r62.4
  circle w3.94: c516.04,3127.29 r62.4
  circle w3.94: c612.92,3454.58 r99.42
  circle w3.94: c4152.29,3451.25 r99.42
  circle w3.94: c4115.83,460.83 r99.42
  circle w3.94: c618.33,462.08 r99.42
  lines w3.94: 416.67,481.67 ccw(c630.83,481.67) 630.83,267.5 4132.92,267.5 ccw(c4132.92,487.92) 4353.33,487.92 4353.33,3419.58 ccw(c4119.17,3419.58) 4119.17,3653.75 632.08,3653.75 ccw(c632.08,3438.33) 416.67,3438.33 416.67,481.67
  text "T=1.6MM" at 520.84,-1.67 h236.22

## Other copper
TopLayer:
  rectangle net UnNamedNet68: 1577.5,1789.17 1757.5,1838.75
  rectangle net UnNamedNet3: 1198.75,921.25 1382.08,977.08
  rectangle net UnNamedNet3: 1004.17,919.17 1077.92,1118.33
  rectangle net UnNamedNet68: 1913.75,1649.17 2556.25,2036.67
  rectangle net UnNamedNet68: 2146.67,1620 2332.92,1682.08
  rectangle net UnNamedNet68: 1713.75,1670.83 1790,1941.67
  rectangle net UnNamedNet3: 3307.08,1211.25 3380.83,1252.92
  rectangle net UnNamedNet3: 3516.25,1379.58 3554.58,1463.12
  rectangle net UnNamedNet3: 3544.79,1379.79 3676.04,1404.17
  rectangle net UnNamedNet3: 3656.88,1285.62 3759.38,1411.04
  rectangle net UnNamedNet3: 441.67,2792.92 581.67,2938.33
  rectangle net UnNamedNet3: 441.25,2630 463.33,2830.83
  rectangle: 952.92,1197.08 1046.66,1291.67
  rectangle net UnNamedNet3: 3449.58,1097.5 3512.92,1156.25
  rectangle net UnNamedNet3: 2758.75,1347.92 2788.33,1489.17
  rectangle net UnNamedNet3: 3485.42,1336.67 3516.67,1367.92
BottomLayer:
  rectangle net UnNamedNet68: 1670,1566.67 2321.67,2064.17
  rectangle net UnNamedNet3: 441.25,2617.08 464.17,2822.5
  rectangle net UnNamedNet3: 441.25,2465.42 631.25,2665.83
  rectangle net UnNamedNet3: 591.67,2622.08 688.75,2808.33
  rectangle net UnNamedNet3: 441.25,2795 692.5,2962.08

## Silkscreen, mask and mechanical layers (free items; w line width, h text height)
TopOverlay:
  lines w7.94: 1405.42,3101.25 1405.42,3170.42 1994.25,3170.42 1994.25,3099.42 ; 1597.08,3099.58 1597.08,3170.42 ; 1798.75,3099.58 1798.75,3170.42 ; 3669.33,1852.42 3669.33,1855.42 ; 3669.58,1852.08 3669.58,1847.08 3669.58,1799.58 4011.33,1799.58 4011.33,1852.41 ; 4035.42,952.92 4035.42,1313.75 4106.25,1313.75 ; 4039.58,918.08 4104.93,918.08 ; 4104.92,1654.75 4035.42,1654.75 4035.42,2050.42 4108.75,2050.42 ; 4105.42,2692.08 4033.75,2692.08 4033.75,2394.42 4105.75,2394.42 ; 4107.08,3005.42 4035.42,3005.42 4035.42,2707.75 4107.42,2707.75 ; 4108.75,1621.25 4031.25,1621.25 4031.25,1323.58 4109.08,1323.58 ; 4108.75,2375.42 4033.75,2375.42 4033.75,2077.75 4109.08,2077.75
  lines w8.94: 848.75,3077.08 848.75,3170.42 1158.75,3170.42 1158.75,3077.42 ; 1166.25,3077.08 1166.25,3170.42 1392.58,3170.42 1392.58,3093.92
  lines w9.94: 2702.08,906.08 2702.08,994.58 3691.25,994.58 3691.25,955.42 ; 2807.08,906.25 2807.08,994.58 ; 2903.75,906.25 2903.75,994.58 ; 3002.92,906.25 3002.92,994.58 ; 3106.25,906.25 3106.25,994.58 ; 3205.42,906.25 3205.42,994.58 ; 3306.25,906.25 3306.25,994.58 ; 3405.42,906.25 3405.42,994.58 ; 3502.92,906.25 3502.92,994.58 ; 3603.75,906.25 3603.75,994.58
  text "Y1-Axis" at 2667.08,3163.75 h45
  text "Y2-Axis" at 3180.42,3163.75 h45
  text "X-Axis" at 2148.75,3162.08 h45
  text "Z-Axis" at 3727.08,3158.75 h45
  text "24V" at 1232.08,3137.08 h25
  text "48V-" at 1438.75,3127.08 h35
  text "48V+" at 1630.42,3125.42 h35
  text "SPN-" at 1835.42,3122.08 h35
  text "GND" at 1230.42,3107.08 h25
  text "+Spindle-" at 890.42,3105.42 h30
  text "DC:7-36V" at 558.75,2992.08 h30
  text "-12V+" at 4090.42,2722.08 h40 r90
  text "+" at 670.41,2595.42 h37
  text "12V" at 4085.42,2567.08 h40 r90
  text "GND" at 4085.42,2403.75 h40 r90
  text "PWM" at 4087.08,2257.08 h36 r90
  text "GND" at 4090.42,2103.75 h36 r90
  text "S-Divz" at 3730.42,2087.08 h28
  text "S-DivY" at 3080.41,2085.42 h28
  text "S-DivX" at 2432.91,2075.42 h28
  text "E-Z" at 3568.75,2070.42 h41
  text "E-X" at 2257.08,2067.08 h39
  text "E-Y" at 2952.08,2062.08 h40
  text "OFF" at 713.75,2047.08 h46
  text "PWM" at 4088.75,1935.42 h36 r90
  text "ON" at 720.42,1810.42 h46
  text "XYY(--)XYZ" at 3712.08,1810.42 h28
  text "GND" at 4085.42,1803.75 h36 r90
  text "12V" at 4088.75,1670.42 h36 r90
  text "PWR" at 453.75,1513.75 h28 r90
  text "12V" at 4088.75,1508.75 h36 r90
  text "-LR" at 4085.42,1343.75 h36 r90
  text "PWM" at 4092.08,1198.75 h36 r90
  text "GND" at 4087.08,1067.08 h36 r90
  text "offLineContollerPluq" at 2001.25,1060.42 h39
  text "RESE1" at 1782.08,1012.08 h28
  text "24V" at 4085.42,938.75 h36 r90
  text "X+" at 2717.08,937.08 h40
  text "Y+" at 2922.08,937.08 h40
  text "Rst" at 3315.42,937.08 h34
  text "A1" at 3617.08,937.08 h40
  text "Y-" at 3023.75,935.42 h40
  text "A2" at 3518.75,935.42 h40
  text "X-" at 2818.75,933.75 h40
  text "Z+" at 3122.08,933.75 h40
  text "Z-" at 3215.42,933.75 h40
  text "A5" at 3415.42,928.75 h40
  text "3V3" at 1456.25,849.58 h28
  text "RUN" at 1557.08,844.58 h28
  text "RX" at 1102.92,813.75 h28
  text "GND" at 1196.25,812.08 h28
  text "5V" at 1312.08,812.08 h28
  text "TX" at 1012.92,811.25 h28
  text "5V" at 1532.92,807.92 h28
  text "PWM" at 1615.42,807.92 h28
  text "GND" at 1422.92,803.75 h28
  text "AUX-1" at 2272.08,757.92 h28
  text "<GND" at 3712.09,750.42 h27
  text "LY-3axis-4.0-V2.0" at 3709.59,704.58 h30
BottomOverlay:
  lines w6.94: 976.67,785 1719.17,785 ; 976.67,846.67 976.67,683.33 1719.17,683.33 1719.17,846.67 978.33,846.67 ; 1402.5,683.33 1402.5,846.67 ; 1405.83,3126.67 1995,3126.67 ; 1405.83,3195 1995,3195 ; 2022.5,3128.33 2518.33,3128.33 ; 2022.5,3198.33 2518.33,3198.33 ; 2061.67,2376.67 2217.5,2376.67 ; 2061.67,2477.5 2217.5,2477.5 ; 2061.67,2581.67 2217.5,2581.67 ; 2132.5,778.33 2544.17,778.33 ; 2132.5,876.67 2544.17,876.67 ; 2132.5,970.83 2544.17,970.83 ; 2235,715 2235,1035.83 2237.5,1035.83 ; 2336.67,715 2336.67,1035.83 ; 2439.17,715 2439.17,1035.83 ; 2545.83,3127.5 3044.17,3127.5 ; 2545.83,3196.67 3044.17,3196.67 ; 2707.5,2378.33 2863.33,2378.33 ; 2707.5,2479.17 2863.33,2479.17 ; 2707.5,2582.5 2863.33,2582.5 ; 2707.5,2677.5 2707.5,2281.67 2863.33,2281.67 2863.33,2677.5 2709.17,2677.5 ; 3071.67,3130.83 3565.83,3130.83 ; 3071.67,3195.83 3555.83,3195.83 3565.83,3195.83 ; 3360.83,2377.5 3515,2377.5 ; 3360.83,2480 3515,2480 ; 3360.83,2581.67 3515,2581.67 ; 3360.83,2677.5 3360.83,2281.67 3515,2281.67 3515,2677.5 3365,2677.5 ; 3597.5,3126.67 4091.67,3126.67 ; 3597.5,3195.83 4091.67,3195.83 ; 4032.5,913.33 4032.5,1301.67 4334.17,1301.67 4334.17,913.33 4036.67,913.33 ; 4032.5,1317.5 4032.5,1614.17 4335.83,1614.17 4335.83,1317.5 4034.17,1317.5 ; 4032.5,1648.33 4334.17,1648.33 4334.17,2045.83 4034.17,2045.83 4034.17,1648.33 ; 4034.17,2705 4034.17,3005 4337.5,3005 4337.5,2705 4038.33,2705 ; 4107.5,1317.5 4107.5,1614.17 ; 4110,2073.33 4110,2681.67 ; 4110.83,913.33 4110.83,1301.67 ; 4110.83,1648.33 4110.83,2045.83 ; 4111.67,2705 4111.67,3005 ; 4177.5,913.33 4177.5,1301.67 ; 4180,1317.5 4180,1614.17 ; 4180,1648.33 4180,2045.83 4181.67,2045.83 ; 4180,2073.33 4180,2681.67 ; 4181.67,2705 4181.67,3005 ; 1405.83,2866.67 1995,2866.67 1995,3274.17 1405.83,3274.17 1405.83,2866.67 ; 2022.5,2970.83 2518.33,2970.83 2518.33,3274.17 2022.5,3274.17 2022.5,2970.83 ; 2061.67,2280 2217.5,2280 2217.5,2680 2061.67,2680 2061.67,2280 ; 2132.5,715 2544.17,715 2544.17,1035.83 2132.5,1035.83 2132.5,715 ; 2545.83,2970.83 3044.17,2970.83 3044.17,3276.67 2545.83,3276.67 2545.83,2970.83 ; 3071.67,2970.83 3565.83,2970.83 3565.83,3276.67 3071.67,3276.67 3071.67,2970.83 ; 3597.5,2970.83 4091.67,2970.83 4091.67,3274.17 3597.5,3274.17 3597.5,2970.83 ; 4032.5,2073.33 4331.67,2073.33 4331.67,2681.67 4032.5,2681.67 4032.5,2073.33
  lines w8.94: 423.33,2476.67 839.17,2476.67 839.17,3020 427.5,3020 ; 425,1837.5 484.17,1837.5 484.17,2093.33 425,2093.33 ; 425,1965.83 484.17,1965.83 ; 427.5,2541.67 839.17,2541.67 ; 433.33,2268.33 920,2268.33 920,1660 425,1660 425,2268.33 519.17,2268.33 ; 848.33,3125.83 1161.67,3125.83 ; 848.33,3191.67 1161.67,3191.67 ; 848.33,3272.5 848.33,3262.5 848.33,2866.67 1161.67,2866.67 1161.67,3272.5 850.83,3272.5 ; 1321.67,2791.67 1321.67,3093.33 ; 1165.83,2791.67 1394.17,2791.67 1394.17,3093.33 1165.83,3093.33 1165.83,2791.67
  lines w9.94: 2694.17,807.5 3703.33,807.5 ; 2694.17,911.67 3703.33,911.67 ; 2694.17,970.83 2694.17,709.17 3703.33,709.17 3703.33,970.83 2697.5,970.83 ; 2902.5,709.17 2902.5,970.83 ; 3102.5,709.17 3102.5,970.83 ; 3300.83,709.17 3300.83,970.83 ; 3402.5,709.17 3402.5,970.83 ; 3501.67,709.17 3501.67,970.83 ; 3598.33,709.17 3598.33,970.83
  text "X-AXIS" at 2380,3221.67 h39
  text "SPINDLE" at 1830,3218.33 h39
  text "Y1-AXIS" at 2903.33,3216.67 h39
  text "Y2-AXIS" at 3425,3216.67 h39
  text "SPINDLE" at 1126.67,3215 h39
  text "Z-AXIS" at 3950,3213.33 h39
  text "A+" at 2343.33,3146.67 h39
  text "SP-" at 1944.17,3145.83 h39
  text "A+" at 2867.5,3145.83 h39
  text "A+" at 3285.83,3145.83 h39
  text "A-" at 3190,3145 h39
  text "B-" at 2239.17,3144.17 h39
  text "A-" at 2961.67,3144.17 h39
  text "B+" at 2135.83,3143.33 h39
  text "A-" at 2443.33,3143.33 h39
  text "A+" at 3914.17,3143.33 h39
  text "A-" at 4011.67,3143.33 h39
  text "+48V" at 1771.67,3141.67 h39
  text "B+" at 2659.17,3142.5 h39
  text "B-" at 2763.33,3141.67 h39
  text "B+" at 3705.83,3140.83 h39
  text "B-" at 3814.17,3140.83 h39
  text "SP+" at 971.67,3140 h39
  text "-48V" at 1566.67,3140 h39
  text "B-" at 3385.83,3139.17 h39
  text "B+" at 3490,3139.17 h39
  text "SP-" at 1141.67,3138.33 h39
  text "+24V-" at 1373.33,3035 h39 r90
  text "12V" at 4163.33,2983.33 h37 r90
  text "FAN" at 4095,2905 h37 r90
  text "GND" at 4161.67,2828.33 h37 r90
  text "X" at 2060,2695 h34
  text "Y" at 2723.33,2693.33 h34
  text "Z" at 3396.67,2691.67 h34
  text "12V" at 4165,2660 h37 r90
  text "A-" at 3430,2611.67 h34
  text "B+" at 2126.67,2610 h34
  text "B+" at 2776.67,2608.33 h34
  text "DC12V/TTL" at 4090,2568.33 h37 r90
  text "A+" at 3431.67,2515 h34
  text "B-" at 2776.67,2513.33 h34
  text "B-" at 2121.67,2510 h34
  text "GND" at 4160,2510 h37 r90
  text "DC:7-36V" at 786.67,2490 h42
  text "A+" at 2126.67,2411.67 h34
  text "A+" at 2773.33,2411.67 h34
  text "B-" at 3421.67,2410 h34
  text "PWM" at 4160,2353.33 h37 r90
  text "A-" at 2773.33,2316.67 h34
  text "B+" at 3431.67,2313.33 h34
  text "A-" at 2128.33,2310 h34
  text "GND" at 4158.33,2193.33 h37 r90
  text "PWM" at 4164.17,2033.33 h37 r90
  text "OFF" at 435,1985 h36 r270
  text "LSR/TTL" at 4086.67,1963.33 h39 r90
  text "GND" at 4163.33,1897.5 h37 r90
  text "ON" at 433.33,1868.33 h36 r270
  text "12V" at 4164.15,1763.33 h37 r90
  text "12V" at 4163.33,1587.5 h37 r90
  text "LASER" at 4089.17,1549.17 h39 r90
  text "-LR" at 4163.33,1440 h37 r90
  text "PWM" at 4164.17,1291.67 h37 r90
  text "LSR/TTL" at 4090,1226.67 h39 r90
  text "GND" at 4162.5,1158.33 h37 r90
  text "24V" at 4160,1029.17 h37 r90
  text "GND" at 2322.5,985.83 h28
  text "TXD" at 2424.17,985.83 h28
  text "+5V" at 2225.83,984.17 h28
  text "RXD" at 2531.67,984.17 h28
  text "A1" at 3679.17,923.33 h39
  text "Xend" at 2875.83,921.67 h39
  text "Yend" at 3072.5,921.67 h39
  text "Zend" at 3277.5,922.5 h39
  text "A5" at 3484.17,921.67 h39
  text "RT" at 3381.67,919.17 h39
  text "A2" at 3585,919.17 h39
  text "+5V" at 1383.33,804.17 h28
  text "GND" at 1272.5,803.33 h28
  text "+5V-" at 1555.83,799.17 h28
  text "PWM" at 1690,799.17 h32
  text "HC05" at 1136.67,798.33 h28
  text "GND" at 2325,727.5 h28
  text "RST" at 2428.33,727.5 h28
  text "+5V" at 2221.67,725.83 h28
  text "NC" at 2518.33,725.83 h28
BottomSolder:
  lines w20.94: 960.83,2111.67 991.67,2111.67